# EAGLE board hwreset_v1 (EAGLE 6.1)
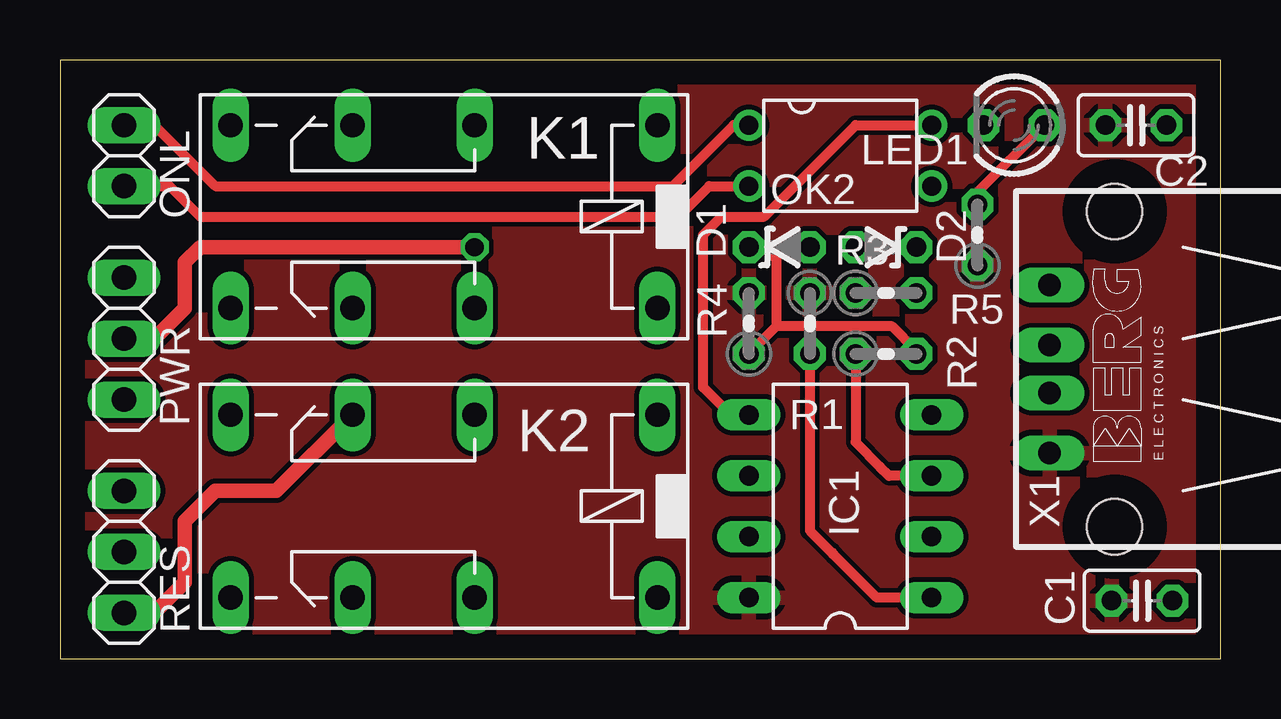
[diagram p0: board, top side]
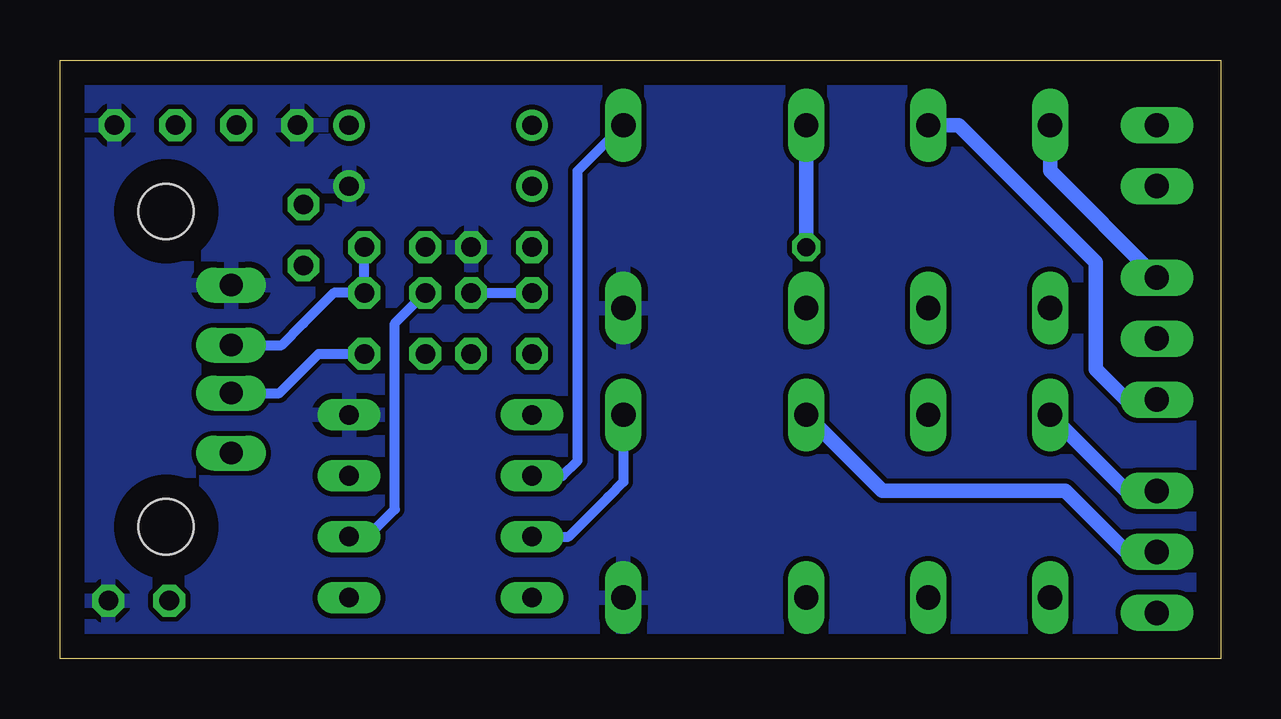
[diagram p1: board, bottom side, seen from below]

Size 48.37 x 24.94 mm. Coordinates in mm from the lower left corner, seen from the top.
Outline: 0,0 48.37,0 48.37,24.94 0,24.94 0,0
Copper layers (1*16): Top 0.035mm / dielectric 1.5mm / Bottom 0.035mm
Design rules: minimum track width 10mil, minimum drill 24mil, track to track 8mil, track to pad 8mil, pad to pad 8mil, via to via 8mil, smd to smd 8mil, copper to edge 40mil, drill to drill 8mil, minimum pad ring 10mil, minimum via ring 8mil, stop-mask expansion 4mil, vias tented up to drill 0mil, thermal gap 10mil

## Footprints (pad centres in the part's own frame; a part is rotated, then mirrored left to right if it is on the bottom)
C025-025X050 = drill 0.813 octagon: 1 -1.27,0; 2 1.27,0
ZDIO-2.5 = drill 0.813 octagon: A 1.27,0; C -1.27,0
DIL08 = drill 0.813 long: 1 -3.81,-3.81; 2 -1.27,-3.81; 3 1.27,-3.81; 4 3.81,-3.81; 5 3.81,3.81; 6 1.27,3.81; 7 -1.27,3.81; 8 -3.81,3.81
351 = drill 1.016 long: 1 -3.81,-3.81; 16 -3.81,3.81; O1 8.89,-3.81; O2 8.89,3.81; P1 3.81,-3.81; P2 3.81,3.81; S1 13.97,-3.81; S2 13.97,3.81
LED3MM = drill 0.813 octagon: A -1.27,0; K 1.27,0
DIP4 = drill 0.8: 1 -1.27,-3.81; 2 1.27,-3.81; 3 1.27,3.81; 4 -1.27,3.81
1X02 = drill 1.016 long: 1 -1.27,0; 2 1.27,0
1X03 = drill 1.016 long: 1 -2.54,0; 2 0,0; 3 2.54,0
0204V = drill 0.813 octagon: 1 -1.27,0; 2 1.27,0
PN87520 = drill 0.95 long: 1 -3.5,2.71; 2 -1,2.71; 3 1,2.71; 4 3.5,2.71 | hole 2.3: -6.57,0; 6.57,0

## Placement (x,y rotation side)
C1  100n  [C025-025X050]  45.09,2.41 0 top
C2  100n  [C025-025X050]  44.83,22.22 0 top
D1  3.3  [ZDIO-2.5]  29.97,17.14 0 top
D2  3.3  [ZDIO-2.5]  34.42,17.14 180 top
IC1  TINY22P  [DIL08]  32.51,6.35 90 top
K1  351  [351]  21.08,18.41 180 top
K2  351  [351]  21.08,6.35 180 top
LED1  [LED3MM]  39.75,22.22 180 top
OK2  SFH618A-3  [DIP4]  32.51,20.95 270 top
ONL  [1X02]  2.67,20.95 90 top
PWR  [1X03]  2.67,13.34 90 top
R1  5k  [0204V]  31.24,13.97 270 top
R2  68  [0204V]  34.42,12.7 0 top
R3  68  [0204V]  34.42,15.24 0 top
R4  2k2  [0204V]  28.7,13.97 90 top
R5  200  [0204V]  38.23,17.65 90 top
RES  [1X03]  2.67,4.45 90 top
X1  [PN87520]  43.94,12.06 90 top

## Library data of the parts
C1 C2 R1-R5 = rcl
D1 D2 = diode
IC1 = atmel; OC_FARNELL: unknown; OC_NEWARK: unknown
K1 K2 = relay; OC_FARNELL: unknown; OC_NEWARK: unknown
LED1 = led
OK2 = optocoupler; MF: VISHAY/TELEFUNKEN; MPN: SFH618A-3; OC_FARNELL: 1020374; OC_NEWARK: 58K2209
ONL PWR RES = pinhead
X1 = con-berg; OC_FARNELL: unknown; OC_NEWARK: unknown

## Nets
+5V: C1.1 C2.1 IC1.8 R1.1 R4.2 R5.1 X1.1
GND: C1.2 C2.2 D1.A IC1.4 K1.16 K2.16 LED1.K OK2.3 X1.4
N$1: IC1.1 R1.2
N$2: IC1.6 K1.1
N$3: K2.P1 RES.2
N$4: IC1.3 R2.1
N$5: IC1.2 R3.1
N$6: K1.P1 PWR.2
N$7: D2.A
N$8: D1.C R2.2 R4.1 X1.2
N$9: D2.C R3.2 X1.3
N$10: K1.O1 PWR.1
N$11: K1.S1 PWR.3
N$12: K2.O1 RES.1
N$13: K2.S1 RES.3
N$14: OK2.1 ONL.2
N$15: OK2.2 ONL.1
N$16: IC1.5 OK2.4
N$17: LED1.A R5.2
ON: IC1.7 K2.1

## Tracks (layer width: path | path; a pad name or v marks a point on that pad's centre or on a via)
+5V
  Bottom 0.406: R1.1 R4.2
  pour Top: 0,25.02 48.39,25.02 48.39,0 0,0
GND
  pour Bottom: 0,25.02 48.39,25.02 48.39,0 0,0
N$1
  Top 0.406: IC1.1 34.04,2.54 32.26,4.32 | 32.26,4.32 32.13,4.45 | R1.2 31.24,5.33 32.26,4.32
N$2
  Bottom 0.406: K1.1 26.8,20.32 26.8,11.43 26.8,8.26 27.43,7.62 IC1.6
N$3
  Bottom 0.61: RES.2 3.94,4.45 6.48,6.99 14.1,6.99 K2.P1
N$4
  Top 0.406: R2.1 33.15,9.02 34.16,8 34.54,7.62 IC1.3
N$5
  Bottom 0.406: IC1.2 35.56,5.08 34.42,6.22 34.42,13.97 R3.1
N$6  (via drill 0.76)
  Top 0.61: PWR.2 3.94,13.34 5.21,14.61 5.21,16.51 5.84,17.14 v17.27,17.14
  Bottom 0.61: v17.27,17.14 K1.P1
N$8
  Top 0.406: R2.2 35.69,12.83 34.67,13.84 29.84,13.84 | 29.84,13.84 R4.1 | D1.C 29.34,17.14 29.84,16.64 29.84,13.84
  Bottom 0.406: X1.2 39.23,11.06 37.59,12.7 R2.2
N$9
  Bottom 0.406: X1.3 39.13,13.06 38.23,13.97 36.96,15.24 R3.2 D2.C
N$10
  Bottom 0.61: K1.O1 10.92,22.22 5.21,16.51 5.21,12.06 3.94,10.79 PWR.1
N$11
  Bottom 0.61: PWR.3 7.11,20.32 K1.S1
N$12
  Top 0.61: RES.1 3.94,1.91 5.21,3.17 5.21,5.71 6.48,6.99 9.02,6.99 K2.O1
N$13
  Bottom 0.61: RES.3 3.94,6.99 K2.S1
N$14
  Top 0.406: ONL.2 3.94,22.22 6.48,19.68 25.53,19.68 27.94,22.1 | 27.94,22.1 28.07,22.22 | OK2.1 28.07,22.22 | 28.07,22.22 27.94,22.1
N$15
  Top 0.406: ONL.1 4.57,19.68 5.84,18.41 25.78,18.41 27.05,19.68 OK2.2
N$16
  Top 0.406: IC1.5 27.94,10.16 26.8,11.3 26.8,17.65 27.56,18.41 29.34,18.41 33.15,22.22 OK2.4 36.2,22.22
N$17
  Top 0.406: R5.2 38.23,19.43 LED1.A
ON
  Bottom 0.406: IC1.7 27.18,5.08 25.53,6.73 24.89,7.37 K2.1